# Altium PCB ArduinoFOC.PcbDoc
Units mil, origin at the board's own origin, x right, y up, seen from the top; angles counter-clockwise.
Board outline 2679.32 x 2096.64 mil, 2 copper layers (Top Layer, Bottom Layer), stack 65.792 mil thick; 45 components, 51 nets, 169 pads, 60 vias.
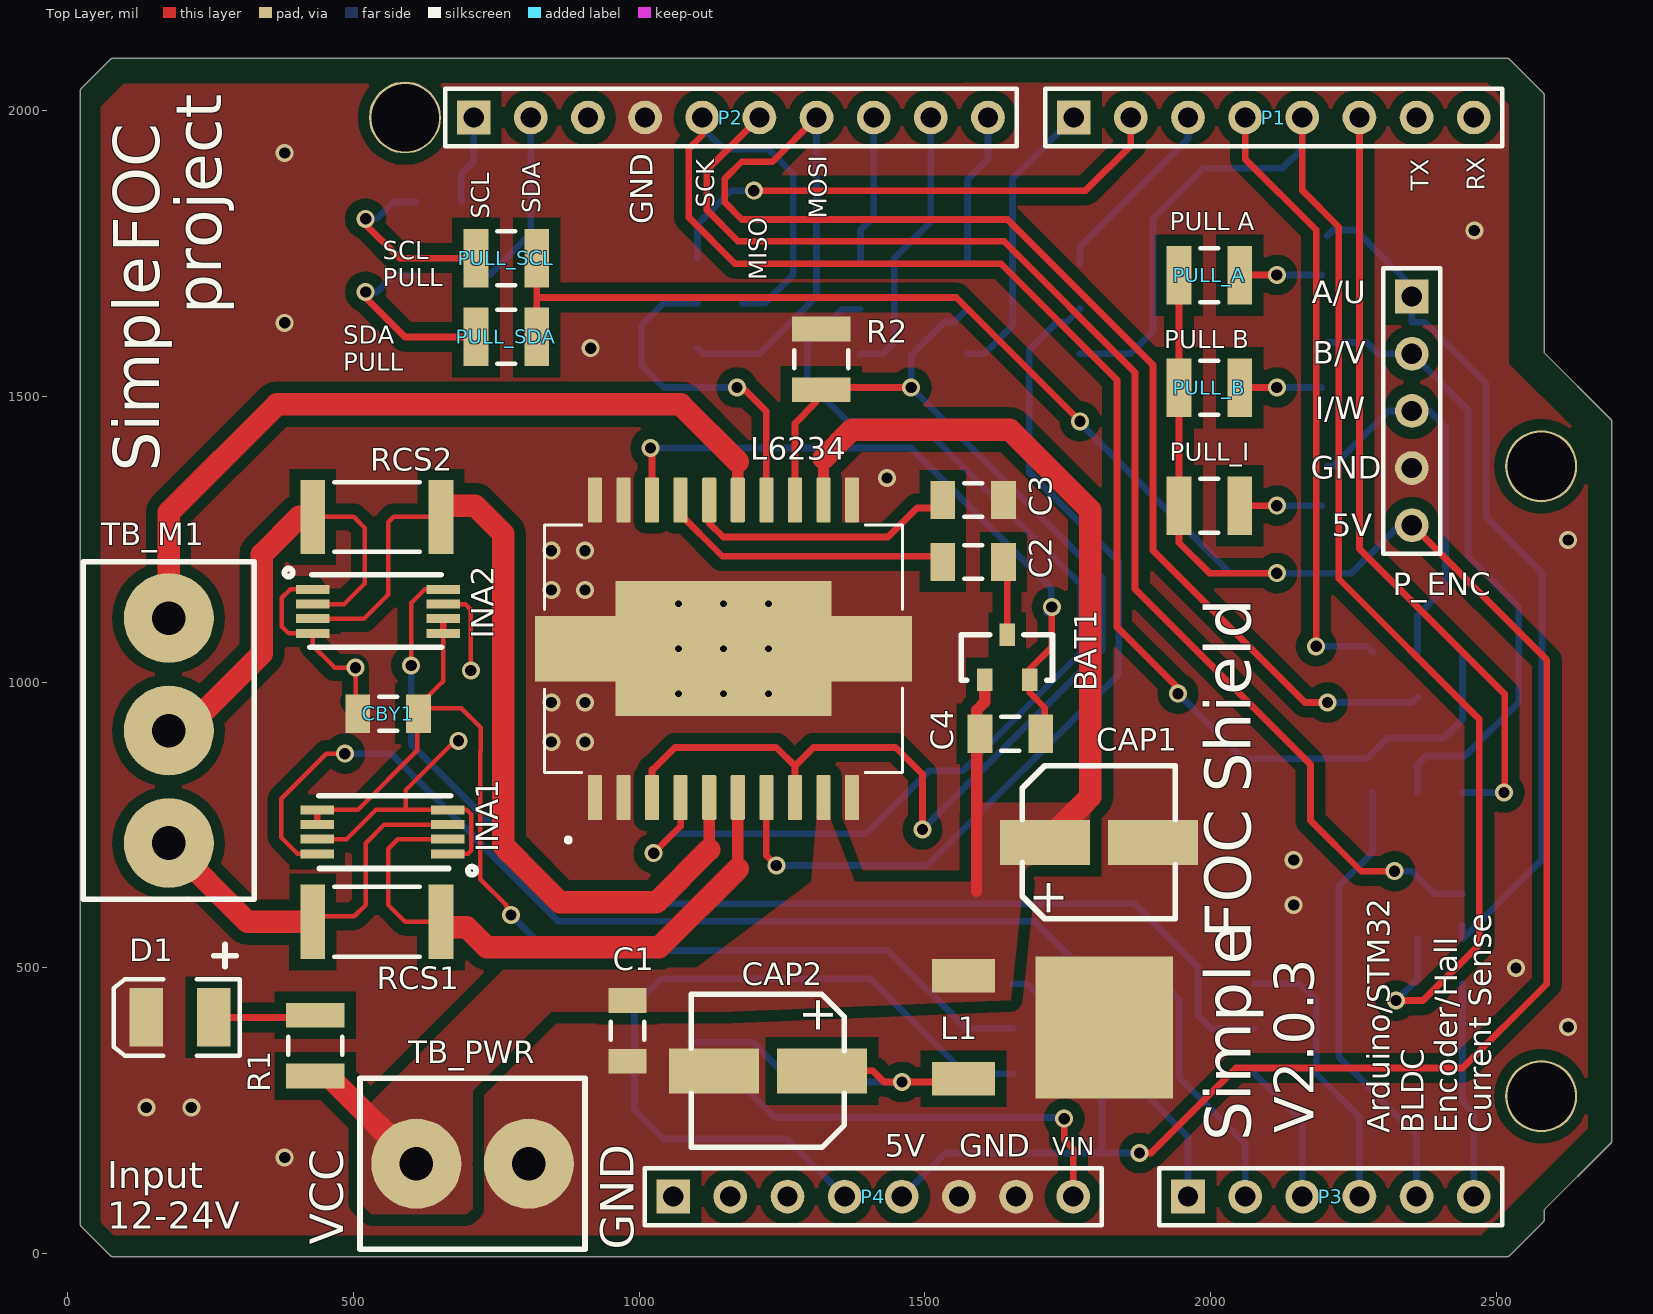
[diagram p0: Top Layer view]
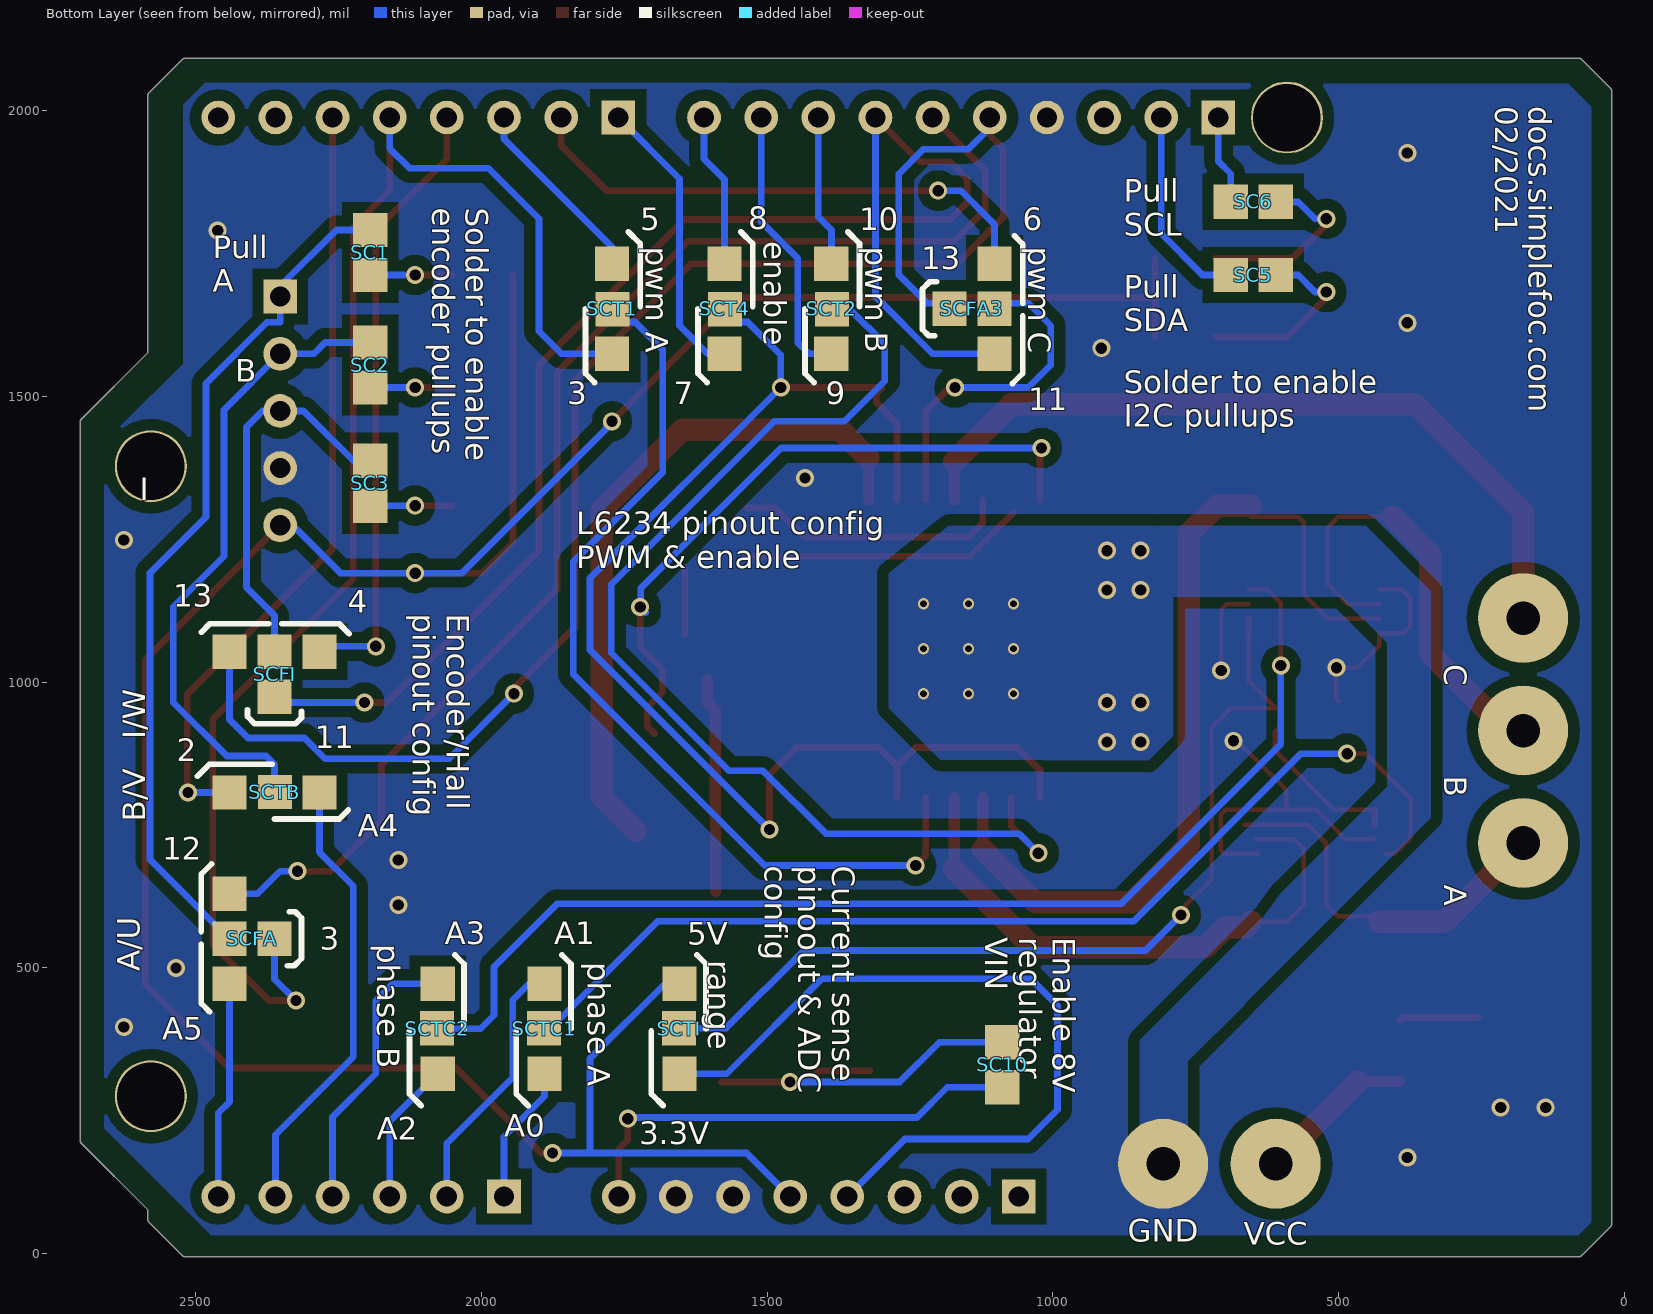
[diagram p1: Bottom Layer view, seen from below]

## Layer stack, top to bottom
Top Solder: solder mask 0.4, Solder Resist, Dk 3.5
Top Layer: signal copper 1.4
Dielectric 1: dielectric 62.9921, FR-4, Dk 4.8
Bottom Layer: signal copper 1.4
Bottom Solder: solder mask 0.4, Solder Resist, Dk 3.5

## Board outline
30.9,40.75 cw(c34.45,44.29) 30.89,40.76 24.01,47.63 75.19,-3.55 75.18,-3.53 ccw(c78.74,0) 78.74,-5.02 2519.68,-5.02 ccw(c2519.68,0) 2523.25,-3.53 2523.23,-3.55 2582.29,55.51 2582.27,55.49 ccw(c2578.74,59.06) 2583.76,59.06 2583.76,76.66 2700.4,193.3 2700.38,193.29 ccw(c2696.85,196.85) 2701.87,196.85 2701.87,1456.69 ccw(c2696.85,1456.69) 2700.38,1460.26 2700.4,1460.24 2583.76,1576.88 2583.76,2027.56 ccw(c2578.74,2027.56) 2582.29,2031.11 2523.23,2090.16 ccw(c2519.68,2086.61) 2519.68,2091.63 78.74,2091.63 ccw(c78.74,2086.61) 75.16,2090.13 75.19,2090.16 24.01,2038.98 24.03,2038.99 ccw(c27.56,2035.43) 22.54,2035.43 22.54,51.18 ccw(c27.56,51.18)

## Design rules (kind name [scope] priority, off if disabled: settings)
Clearance [All] p1: gap=19.68 ignorepadtopadclearanceinfootprint=FALSE except(7.87: Arc-Arc Arc-Track Arc-SMDPad Track-Track Track-SMDPad SMDPad-SMDPad)
ComponentClearance [InComponent('P_MOT') vs InComponent('TB_M1')] p1: gap=10 collisioncheckmode=3 verticalgap=10 showdistances=FALSE
NetsToIgnore [All] p1:
PolygonConnect PolygonConnect_2 [InNet('VCC')] p1: thpad.connectstyle=Direct thpad.reliefconductorwidth=10 thpad.reliefentries=4 thpad.polygonreliefangle="90 Angle" thpad.airgapwidth=10 smdpad.connectstyle=Direct smdpad.reliefconductorwidth=10 smdpad.reliefentries=4 smdpad.polygonreliefangle="90 Angle" smdpad.airgapwidth=10 via.connectstyle=Relief via.reliefconductorwidth=10 via.reliefentries=4 via.polygonreliefangle="90 Angle" via.airgapwidth=10
PolygonConnect PolygonConnect_1 [InNet('GND')] p2: connectstyle=Direct reliefconductorwidth=10 reliefentries=4 polygonreliefangle="90 Angle" airgapwidth=10
PolygonConnect [All] p3: connectstyle=Relief reliefconductorwidth=10 reliefentries=4 polygonreliefangle="90 Angle" airgapwidth=10
RoutingVias [All] p1: holewidth=19.68 width=31.5 viastyle="Through Hole" minholewidth=11.81 minwidth=19.68 maxholewidth=28 maxwidth=50
SolderMaskExpansion [All] p1: expansion=4 istentingtop=FALSE
UnpouredPolygon [All] p1: allowunpoured=TRUE allowshelved=TRUE
Width Mot_line [InNetClass('Mot')] p1: maxlimit=39.37 minlimit=3.94 preferedwidth=7.87 minimp=50.000000 maximp=50.000000 favimp=50.000000
Width PWR_line [InNet('VCC')] p2: maxlimit=39.37 minlimit=7.87 preferedwidth=19.68 minimp=50.000000 maximp=50.000000 favimp=50.000000
Width GND_line [InNet('GND')] p3: maxlimit=47.24 minlimit=3.94 preferedwidth=7.87 minimp=50.000000 maximp=50.000000 favimp=50.000000
Width [All] p4: maxlimit=39.37 minlimit=7.87 preferedwidth=11.81 minimp=50.000000 maximp=50.000000 favimp=50.000000
28 further rules are at their usual default settings.

## Classes and differential pairs
net class Mot: NetINA1_2 NetINA1_3 NetINA2_2 NetINA2_3 NetL6234_15

## Components (designator, comment, footprint, x,y, rotation, side; value= is the part's Value field where it differs from the comment)
BAT1 "BAT54S" BAT54s 1683.7,1083.31 r270 top
C1 "Cap Semi" C1206 980,390 r270 top value=100nF
C2 "Cap Semi" C1206 1584.65,1210.63 r0 top value=10nF
C3 "Cap Semi" C1206 1584.65,1318.9 r0 top value=1uF
C4 "Cap Semi" C1206 1650,910 r0 top value=220nF
CAP1 "EEH-ZA1E101XP" EEH-ZA1E101XP 1938.35,853.86 r180 top
CAP2 "VZH100M1HTR-0606" EEH-ZA1E101XP 1091.65,186.14 r0 top
CBY1 "Cap Semi" C1206 561.02,944.88 r0 top value=0.1uF
D1 "LED3" 3.5X2.8X1.9 196.85,413.39 r180 top
INA1 "INA240" INA240 551.18,738.19 r90 top
INA2 "INA240" INA240 543.31,1124.02 r270 top
L1 "l78M08" L7805 1711.61,401.57 r0 top
L6234 "L6234PD013TR" SOIC127P1420X360-21N 1147.83,1058.66 r0 top
P1 "Header 8" HDR1X8 1760.63,1988.19 r0 top locked
P2 "Header 10" HDR1X10 710.63,1988.19 r0 top
P3 "Header 6" HDR1X6 1960.63,100 r0 top locked
P4 "Header 8" HDR1X8 1059.84,100 r0 top locked
P_ENC "Header 5" HDR1X5 2352.36,1674.8 r270 top
PULL_A "Res3" 14-1210 1998.03,1712.6 r0 top value=3.3K
PULL_B "Res3" 14-1210 1998.03,1515.75 r0 top value=3.3K
PULL_I "Res3" 14-1210 1998.03,1309.06 r0 top value=3.3K
PULL_SCL "Res3" 14-1210 767.72,1742.13 r180 top value=4.7K
PULL_SDA "Res3" 14-1210 767.72,1604.33 r180 top value=4.7K
R1 "Res3" 14-1210 433.07,364.17 r270 top value=1K
R2 "Res3" 14-1210 1318.9,1564.96 r270 top value=4.7K
RCS1 "Res3" RESC6332 541.34,580.71 r180 top value=10mOhm
RCS2 "Res3" RESC6332 541.34,1289.37 r180 top value=10mOhm
SC1 "solder_connection" solder_connection 2194.88,1791.34 r270 bottom
SC2 "solder_connection" solder_connection 2194.88,1594.49 r270 bottom
SC3 "solder_connection" solder_connection 2194.88,1387.8 r270 bottom
SC5 "solder_connection" solder_connection 688.98,1712.6 r180 bottom
SC6 "solder_connection" solder_connection 688.98,1840.55 r180 bottom
SC10 "solder_connection" solder_connection 1088.58,370.08 r270 bottom
SCFA "solder_connection_four" solder_connection_four 2440.94,551.18 r90 bottom
SCFA3 "solder_connection_four" solder_connection_four 1102.36,1653.54 r270 bottom
SCFI "solder_connection_four" solder_connection_four 2362.2,1053.15 r180 bottom
SCT1 "solder_connection_tripple" solder_connection_tripple 1771.65,1653.54 r270 bottom
SCT2 "solder_connection_tripple" solder_connection_tripple 1387.8,1653.54 r270 bottom
SCT4 "solder_connection_tripple" solder_connection_tripple 1574.8,1653.54 r270 bottom
SCTB "solder_connection_tripple" solder_connection_tripple 2362.2,807.09 r180 bottom
SCTC1 "solder_connection_tripple" solder_connection_tripple 1889.76,393.7 r90 bottom
SCTC2 "solder_connection_tripple" solder_connection_tripple 2076.77,393.7 r90 bottom
SCTI "3.3 or 5 v" solder_connection_tripple 1653.54,393.7 r90 bottom
TB_M1 "TB002-500-03BE" TB002-500-03BE 177.17,718.5 r90 top
TB_PWR "TB002-500-02BE" TB002-500-02BE 807.09,157.48 r180 top

## Footprints (in the part's own frame and the unit in brackets; to place one, negate y for a bottom-side part, rotate by r counter-clockwise, add the part's x,y. Pads: shape width x height; smd on the part's side, far side on the other; paste and mask are expansions set on the pad)
3.5X2.8X1.9 [mm] "SM LED; 2 C-Bend Leads; Body 3.5 x 2.8 x 1.9 mm, inc leads (LxWxH typ)"
  rect 1.5x2.6 smd: 1(-1.5,0) 2(1.5,0)
  silkscreen extent -2.65,-1.7 2.95,1.7
14-1210 [mm] "Chip Resistor, Body 3.2x2.5mm, IPC High Density"
  rect 1.1x2.6 smd: 1(-1.35,0) 2(1.35,0)
  silkscreen extent -0.4,-1.2 0.4,1.2, body extent -1.68,-1.32 1.68,1.32, height 0.9
BAT54s [mm]
  rect 1x0.7 smd: 1(2,-2) 2(2,0) 3(0,-1)
  silkscreen extent 0,-3.05 2.03,1.02, body extent -0.46,-2.48 2.46,0.44, height 1
C1206 [mm] "Chip Capacitor, Body 3.2x1.6mm, IPC High Density"
  rect 1.1x1.7 smd: 1(-1.35,0) 2(1.35,0)
  silkscreen extent -0.4,-0.75 0.4,0.75, body extent -1.7,-0.9 1.7,0.9, height 1.3
EEH-ZA1E101XP [mm]
  rect 4x2 smd: 1(1,3.4) 2(5.8,3.4)
  silkscreen extent 0,0 6.8,6.8, body extent -0.3,0.2 7,6.8, height 7.7
HDR1X5 [mm] "Connector; Header; 5 Position"
  rect 1.5x1.5 hole 0.9: 1(0,0)
  round 1.5 hole 0.9: 2(2.54,0) 3(5.08,0) 4(7.62,0) 5(10.16,0)
  silkscreen extent -1.27,-1.27 11.43,1.27
HDR1X6 [mm] "Connector; Header; 6 Position"
  rect 1.5x1.5 hole 0.9: 1(0,0)
  round 1.5 hole 0.9: 2(2.54,0) 3(5.08,0) 4(7.62,0) 5(10.16,0) 6(12.7,0)
  silkscreen extent -1.27,-1.27 13.97,1.27
HDR1X8 [mm] "Connector; Header; 8 Position"
  rect 1.5x1.5 hole 0.9: 1(0,0)
  round 1.5 hole 0.9: 2(2.54,0) 3(5.08,0) 4(7.62,0) 5(10.16,0) 6(12.7,0) 7(15.24,0) 8(17.78,0)
  silkscreen extent -1.27,-1.27 19.05,1.27
HDR1X10 [mm] "Connector; Header; 10 Position"
  rect 1.5x1.5 hole 0.9: 1(0,0)
  round 1.5 hole 0.9: 2(2.54,0) 3(5.08,0) 4(7.62,0) 5(10.16,0) 6(12.7,0) 7(15.24,0) 8(17.78,0) 9(20.32,0) 10(22.86,0)
  silkscreen extent -1.27,-1.27 24.13,1.27
INA240 [mm]
  rect 0.4x1.5 smd mask+0.05: 1(-0.975,-2.9) 2(-0.325,-2.9) 3(0.325,-2.9) 4(0.975,-2.9) 5(0.975,2.9) 6(0.325,2.9) 7(-0.325,2.9) 8(-0.975,2.9)
  silkscreen extent -1.91,-4.16 1.6,2.83, body extent -1.5,-3.3 1.5,3.3, height 1.2
L7805 [mm] "l7805"
  rect 2.8x1.5 smd: 1(-3.65,2.15) 3(-3.65,-2.422)
  rect 6.1x6.3 smd: 2(2.6,-0.15)
  body extent -4.66,-3.3 5.06,3.1, height 2.3
RESC6332 [mm] "Chip Resistor, Body 6.3x3.2mm, IPC High Density"
  rect 1.1x3.3 smd: 1(-2.85,0) 2(2.85,0)
  silkscreen extent -1.9,-1.55 1.9,1.55, body extent -3.22,-1.68 3.22,1.68, height 0.9
SOIC127P1420X360-21N [mm]
  rrect16% 0.63x1.99 smd: 1(-5.715,-6.61) 2(-4.445,-6.61) 3(-3.175,-6.61) 4(-1.905,-6.61) 5(-0.635,-6.61) 6(0.635,-6.61) 7(1.905,-6.61) 8(3.175,-6.61) 9(4.445,-6.61) 10(5.715,-6.61) 11(5.715,6.61) 12(4.445,6.61) 13(3.175,6.61) 14(1.905,6.61) 15(0.635,6.61) 16(-0.635,6.61) 17(-1.905,6.61) 18(-3.175,6.61) 19(-4.445,6.61) 20(-5.715,6.61)
  rect 9.6x6 smd paste-6: 21(0,0)
  rect 4x2.9 smd paste-3: 22(-6.375,0) 23(6.375,0)
  silkscreen extent -7.95,-8.6 7.95,5.5, body extent -8.26,-7.73 7.8,8.27, height 3.5
solder_connection [mil]
  rect 60x60 smd: 1(0,0) 2(78.74,0)
solder_connection_four [mil]
  rect 60x60 smd: 1(0,0) 2(78.74,0) 3(-78.74,0) 4(0,-78.74)
  silkscreen extent -128,-126 131,49
solder_connection_tripple [mil]
  rect 60x60 smd: 1(0.98,0.98) 2(78.74,0) 3(-78.74,0)
  Top Layer region: -28.54,34.45
  silkscreen extent -135,-46 129,49
TB002-500-02BE [mm] "TB002-500-02BE"
  round 4 hole 1.5: 1(0,0) 2(5,0)
  silkscreen extent -2.5,-3.8 7.5,3.8, body extent -2.5,-4.4 7.5,4.6, height 13.55
TB002-500-03BE [mm] "TB002-500-03BE"
  round 4 hole 1.5: 1(0,0) 2(5,0) 3(10,0)
  Top Layer lines w0.254: 0,0 0,-0.08
  silkscreen extent -2.5,-3.8 12.5,3.8, body extent -2.57,-5.2 13.17,4.6, height 13.8

## Part data
BAT1: Supplier Part Number 1=512-BAT54S, Supplier 1=Mouser
C1 C2 C3 C4 CBY1: "Capacitor (Semiconductor SIM Model)", LatestRevisionDate=29-May-2009, LatestRevisionNote="IPC-7351 Footprint Added.", PackageDescription="Chip Capacitor", PackageReference=C1206, Published=8-Jun-2000, Publisher="Altium Limited"
CAP1: Supplier Part Number 1=667-EEH-ZA1E101XP, Supplier 1=Mouser
CAP2: library part EEH-ZA1E101XP, Supplier Part Number 1=667-EEH-ZA1E101XP, Supplier 1=Mouser
D1: "Typical BLUE SiC LED", DatasheetVersion=16-Apr-2002, LatestRevisionDate=17-Dec-2003, LatestRevisionNote="PCB Footprint replaced.", PackageDescription="SM LED; 2 C-Bend Leads; Body 3.5 x 2.8 x 1.9 mm, inc leads (LxWxH typ)", PackageReference=3.5X2.8X1.9, PackageVersion=16-Apr-2002, Published=8-Jun-2000, Publisher="Altium Limited"
INA1 INA2: Supplier Part Number 1=595-INA240A2PWR, Supplier 1=Mouser
L6234: "Motor Driver BiCDMOS Parallel PowerSO-20", Package="SO-20 STMicroelectronics", Digi-Key_Part_Number=497-5352-1-ND, Digi-Key_Purchase_URL=https://www.digikey.com/product-detail/en/stmicroelectronics/L6234PD013TR/497-5352-1-ND/1154483?utm_source=snapeda&utm_medium=aggregator&utm_campaign=symbol, MF=STMicroelectronics, MP=L6234PD013TR, SnapEDA_Link=https://www.snapeda.com/parts/L6234PD013TR/STMicroelectronics/view-part/75337/?ref=snap
P1 P4: "Header, 8-Pin", LatestRevisionDate=17-Jul-2002, LatestRevisionNote="Re-released for DXP Platform.", Publisher="Altium Limited"
P2: "Header, 10-Pin", LatestRevisionDate=17-Jul-2002, LatestRevisionNote="Re-released for DXP Platform.", Publisher="Altium Limited"
P3: "Header, 6-Pin", LatestRevisionDate=17-Jul-2002, LatestRevisionNote="Re-released for DXP Platform.", Publisher="Altium Limited"
P_ENC: "Header, 5-Pin", LatestRevisionDate=17-Jul-2002, LatestRevisionNote="Re-released for DXP Platform.", Publisher="Altium Limited"
PULL_A PULL_B PULL_I PULL_SCL PULL_SDA R1 R2 RCS1 RCS2: "Resistor", LatestRevisionDate=29-May-2009, LatestRevisionNote="IPC-7351 Footprint Added.", PackageDescription="Chip Resistor", PackageReference=J1-0603, Published=8-Jun-2000, Publisher="Altium Limited"
SCTI: library part solder_connection_tripple
TB_M1: Supplier Part Number 1=490-TB002-500-03BE, Supplier 1=Mouser
TB_PWR: Supplier Part Number 1=490-TB002-500-02BE, Supplier 1=Mouser

## Free pads (board coordinates)
  round 125.98 hole 118.11: T1(590.55,1988.19) T2(2578.74,1377.95) T3(2578.74,275.59)

## Via types
v1: diameter 31.5, hole 19.68, Top Layer to Bottom Layer, 51 vias
v2: diameter 19.68, hole 11.81, Top Layer to Bottom Layer, 9 vias

## Nets (pads, with @x,y where several pads share a name; then routed paths per layer and width w, separated by ;. In a path a pad name is that pad's centre, name@x,y a point inside that pad or via, vN(x,y) a via of type N, cw(c..) or ccw(c..) an arc to the next point about the centre after c; other vN are vias at no path point)
3.3V: P4.4 SCTI.3 | length 1362.6
  Bottom Layer w11.81: P4.4 1259.06,200.79 1043.31,200.79 992.13,251.97 992.13,434.06 1039.37,481.3 1404.53,481.3 1570.87,314.96 SCTI.3
+5: P4.5 P_ENC.5 PULL_A.1 PULL_B.1 PULL_I.1 PULL_SCL.1 PULL_SDA.1 SCTI.2 | length 5147.3
  Top Layer w11.81: PULL_SDA.1 820.87,1673.23 ; PULL_SCL.1 820.87,1673.23 ; v1(1771.65,1456.69) 1555.12,1673.23 820.87,1673.23 ; v1(1875.98,176.18) 1896.18,176.18 2044.8,324.8 2440.94,324.8 2588.58,472.44 2588.58,1038.58 P_ENC.5 P_ENC.5@2327.95,1274.8 ; PULL_A.1 PULL_B.1 PULL_I.1 1944.88,1244.09 1998.03,1190.94 v1(2116.14,1190.94)
  Bottom Layer w11.81: P4.5 1536.02,176.18 1811.02,176.18 ; SCTI.2 1679.13,472.44 1810.04,341.54 1810.04,177.17 1811.02,176.18 ; v1@1781.5,1456.69 1781.5,1443.9 2034.45,1190.94 v1(2116.14,1190.94) 2247.05,1190.94 2330.91,1274.8 P_ENC.5 ; v1(1875.98,176.18) 1811.02,176.18
GND: C1.2 C3.2 CAP1.1 CAP2.1 CBY1.1 D1.2 INA1.1 INA1.4 INA1.7 INA2.1 INA2.4 INA2.7 L1.2 L6234.1 L6234.2 L6234.10 L6234.11 L6234.19 L6234.20 L6234.21 L6234.22 L6234.23 P2.4 P4.6 P4.7 P_ENC.4 R2.1 TB_PWR.1 | length 1092.1
  Top Layer w7.87: INA2.1 389.76,1162.4 375,1147.64 375,1097.44 386.81,1085.63 INA2.4 429.13,1063.98 461.26,1031.85 467.52,1025.59 v1(503.94,1025.59) 503.94,970.26 CBY1.1@500.6,966.92 ; INA1.7@439.96,728.35 INA1.7 488.19,725.39 539.37,776.57 591.54,776.57 ; INA1.1@641.66,699.8 INA1.1 700.79,699.8 706.69,705.71 706.69,768.7 698.82,776.57 INA1.4 591.54,776.57 ; INA2.7 695.87,1136.81 705.71,1126.97 v1(705.71,1020.67) ; v1(684.06,897.64) 678.15,897.64 591.54,811.02 591.54,776.57
  other v1: 379.92,168.31 137.8,255.91 216.54,255.91 2625.98,396.65 2534.45,500 2145.67,610.24 2145.67,688.98 846.46,895.67 905.51,895.67 846.46,964.57 905.51,964.57 846.46,1161.42 905.51,1161.42 846.46,1230.32 905.51,1230.32 2625.98,1249.02 1434.06,1357.28 915.35,1584.65 379.92,1628.94 2461.61,1790.35 379.92,1926.18
  other v2: 1069.09,979.92 1147.83,979.92 1226.57,979.92 1069.09,1058.66 1147.83,1058.66 1226.57,1058.66 1069.09,1137.4 1147.83,1137.4 1226.57,1137.4
NetBAT1_2: BAT1.2 C4.2 L6234.18 | length 1200.9
  Top Layer w11.81: v1(1020,1410) 1017.16,1410 1022.83,1404.33 L6234.18 ; C4.2@1697.48,910 1710,922.52 1710,955.43 1683.7,981.74 1683.7,1022.99 1722.44,1061.74 v1(1722.44,1131.89)
  Bottom Layer w11.81: v1(1020,1410) 1475.83,1410 1721.46,1164.37 v1@1721.46,1130.91 ; v1@1712.6,1122.05 v1@1721.46,1130.91 ; v1(1722.44,1131.89) v1@1721.46,1130.91
NetBAT1_3: BAT1.3 C2.2 | length 117.5
  Top Layer w11.81: BAT1.3 C2.2@1644.33,1200.79
NetC2_1: C2.1 L6234.17 | length 500.3
  Top Layer w11.81: L6234.17@1068.9,1297.24 1145.67,1220.47 C2.1@1537.4,1220.47
NetC3_1: C3.1 L6234.16 | length 484.1
  Top Layer w11.81: L6234.16 1122.83,1278.74 1147.44,1254.13 1435.43,1254.13 1486.42,1305.12 C3.1@1535.43,1305.12
NetCAP2_2: CAP2.2 L1.3 SC10.1 | length 668.5
  Top Layer w11.81: CAP2.2 1409.64,320 1429.04,300.59 v1(1460,300.59) 1579.41,300.59 L1.3@1580,300
  Bottom Layer w11.81: SC10.1 1198.82,370.08 1268.31,300.59 v1(1460,300.59)
NetCBY1_2: CBY1.2 INA1.5 INA1.6 INA2.5 INA2.6 SCTI.1 | length 1937.9
  Top Layer w7.87: INA1.5 507.87,776.57 612.2,880.91 612.2,912.96 600.39,924.77 CBY1.2@600.39,954.72 ; INA2.5 657.48,1001.97 647.93,992.42 610.24,954.72 688.98,954.72 723.43,920.28 723.43,881.33 722.44,880.35 722.44,655.51 767.72,610.24 766.73,609.25 775.93,600.06 v1(775.93,592.52)
  Top Layer w11.81: INA1.6 INA1.5 ; INA2.5 INA2.6
  Bottom Layer w11.81: v1(775.93,592.52) 837.94,530.51 1436.02,530.51 1571.85,394.69 SCTI.1
NetD1_1: D1.1 R1.1 | length 140.2
  Top Layer w11.81: D1.1 387.79,413.39 R1.1@393.7,407.48
NetINA1_2: INA1.2 L6234.6 RCS1.1 | length 1014.2
  Top Layer w7.87: INA1.2@645.67,725.39 577.76,725.39 561.02,708.66 561.02,610.24 590.55,580.71 RCS1.1
  Top Layer w19.68: 1172.83,673.48 L6234.6
  Top Layer w39.37: RCS1.1 663.39,570.87 698.82,570.87 733.32,536.36 1035.71,536.36 1172.83,673.48
NetINA1_3: INA1.3 RCS1.2 TB_M1.1 | length 679.2
  Top Layer w7.87: RCS1.2 438.98,590.55 501.97,590.55 521.65,610.24 521.65,718.5 554.13,750.98 INA1.3
  Top Layer w39.37: TB_M1.1 314.96,580.71 RCS1.2
NetINA1_8: INA1.8 SCTC1.1 | length 1874.8
  Top Layer w7.87: INA1.8@417.32,699.8 402.56,699.8 374.02,728.35 374.02,796.19 452.87,875.04 v1(485.26,875.04)
  Bottom Layer w11.81: v1(485.26,875.04) 565.9,875.04 859.25,581.69 938.98,581.69 1357.28,581.69 1691.93,581.69 1879.92,393.7 SCTC1.1@1889.76,403.54
NetINA2_2: INA2.2 RCS2.2 TB_M1.2 | length 824.3
  Top Layer w0: RCS2.2@419.29,1299.21 RCS2.2@433.07,1299.21
  Top Layer w7.87: INA2.2 484.25,1136.81 519.69,1172.24 519.69,1270.32 500.63,1289.37 RCS2.2
  Top Layer w11.81: TB_M1.2 TB_M1.2@205.35,915.35 ; 405.51,1289.37 RCS2.2
  Top Layer w39.37: TB_M1.2@205.35,915.35 340,1050 340,1223.86 405.51,1289.37
NetINA2_3: INA2.3 L6234.5 RCS2.1 | length 1609.5
  Top Layer w7.87: INA2.3 518.7,1111.22 561.02,1153.54 561.02,1279.76 570.63,1289.37 RCS2.1
  Top Layer w19.68: 1122.83,707 L6234.5
  Top Layer w39.37: RCS2.1@653.54,1309.06 713.36,1309.06 762.8,1259.62 762.8,714.57 790.35,687.01 ; 767.72,708.66 789.86,686.52 861.61,614.76 1030.6,614.76 1122.83,707
NetINA2_8: INA2.8 SCTC2.1 | length 2044.2
  Top Layer w7.87: v1(601.38,1029.53) 601.38,1138.78 625,1162.4 INA2.8
  Bottom Layer w11.81: v1(601.38,1029.53) 601.38,891.73 880.91,612.2 977.36,612.2 1868.11,612.2 1978.35,501.97 1978.35,417.32 2001.97,393.7 SCTC2.1@2076.77,393.7
NetL6234_3: L6234.3 L6234.8 L6234.13 R2.2 SCT4.1 | length 2365.6
  Top Layer w11.81: L6234.3 1022.83,845.67 ; 1022.83,847.24 1022.83,845.67 ; L6234.8 1272.83,853.15 ; L6234.13 1272.83,1452.95 1309.06,1489.17 1309.06,1505.91 1299.21,1515.75 v1(1476.38,1515.75) v1@1480.32,1519.69 ; v1(1496.06,742.33) 1496.06,838.96 1449.19,885.83 1305.51,885.83 1272.83,853.15 ; 1022.83,845.67 1062.99,885.83 1240.16,885.83 1272.83,853.15
  Bottom Layer w11.81: v1(1496.06,742.33) 1810,1056.27 1810,1182.13 v1(1476.38,1515.75) 1476.38,1572.57 1534.2,1630.39 1551.65,1630.39 SCT4.1@1574.8,1653.54
NetL6234_4: L6234.4 SCT2.1 | length 1937.5
  Top Layer w11.81: v1(1025.59,700.79) 1072.83,748.03 L6234.4
  Bottom Layer w11.81: v1(1025.59,700.79) 1059.79,734.99 1397.39,734.99 1507.38,844.98 1566.44,844.98 1773.03,1051.57 1773.03,1170.87 1487.2,1456.69 1365.16,1456.69 1294.29,1527.56 1294.29,1591.54 1355.31,1652.56 SCT2.1
NetL6234_7: L6234.7 SCT1.1 | length 1615.7
  Top Layer w11.81: L6234.7 1222.83,696.46 v1(1240.16,679.13)
  Bottom Layer w11.81: v1(1240.16,679.13) 1504.41,679.13 1839.57,1014.29 1839.57,1210.43 1683.07,1366.93 1683.07,1582.41 1731.05,1630.39 1748.5,1630.39 SCT1.1@1771.65,1653.54
NetL6234_14: L6234.14 SCFA3.1 | length 591.2
  Top Layer w11.81: v1(1171.26,1515.75) 1181.1,1515.75 1222.83,1474.02 L6234.14
  Bottom Layer w11.81: SCFA3.1@1102.36,1663.39 1043.31,1663.39 1003.94,1624.02 1003.94,1555.12 1043.31,1515.75 v1(1171.26,1515.75)
NetL6234_15: L6234.15 TB_M1.3 | length 1381.6
  Top Layer w19.68: L6234.15 1172.83,1386.22
  Top Layer w39.37: TB_M1.3@187.01,1102.36 TB_M1.3 177.17,1297.17 366.22,1486.22 1072.83,1486.22 1172.83,1386.22
NetP1_1: P1.1 SCT4.2 | length 507.7
  Bottom Layer w11.81: SCT4.2 1604.33,1574.8 1653.54,1624.02 1653.54,1881.1 P1.1
NetP1_2: P1.2 SCFA3.3 | length 923.4
  Top Layer w11.81: v1(1200.79,1860.24) 1781.5,1860.24 1860.63,1939.37 P1.2
  Bottom Layer w11.81: SCFA3.3@1102.36,1742.13 1102.36,1801.18 1161.42,1860.24 v1(1200.79,1860.24)
NetP1_3: P1.3 SCT1.3 | length 334.2
  Bottom Layer w11.81: SCT1.3 1771.65,1761.81 1960.63,1950.79 P1.3
NetP1_4: P1.4 SCFI.2 | length 1069.4
  Top Layer w11.81: P1.4 2060.63,1915.75 2185.04,1791.34 v1@2185.04,1072.83
  Bottom Layer w11.81: v1(2185.04,1062.99) 2273.62,1062.99 SCFI.2
NetP1_5: P1.5 SCFA.4 SCT1.2 | length 2592.5
  Top Layer w11.81: P1.5 2160.63,1860.29 2224.41,1796.51 2224.41,1181.1 2470.47,935.04 2470.47,541.34 2372.05,442.91 v1(2324.8,442.91)
  Bottom Layer w11.81: SCT1.2 1860.24,1574.8 1899.61,1614.17 1899.61,1811.02 1988.19,1899.61 2125.98,1899.61 2160.63,1934.25 P1.5 ; v1(2324.8,442.91) 2362.2,480.32 SCFA.4
NetP1_6: P1.6 SCTB.3 | length 1384.1
  Top Layer w11.81: P1.6 2260.63,1233.46 2514.76,979.33 2514.76,814.96 v1@2522.64,807.09
  Bottom Layer w11.81: SCTB.3 2524.61,807.09 v1(2513.78,807.09)
NetP2_1: P2.1 SC6.1 | length 156.6
  Bottom Layer w11.81: SC6.1 688.98,1889.76 710.63,1911.42 P2.1
NetP2_2: P2.2 SC5.1 | length 345
  Bottom Layer w11.81: SC5.1@698.82,1712.6 738.19,1712.6 810.63,1785.04 P2.2
NetP2_5: P2.5 SCFA3.4 SCFI.3 | length 2827.8
  Top Layer w11.81: P2.5@1119.69,1979.13 1110.63,1970.08 1110.63,1957.09 1087.2,1933.66 1087.2,1813.19 1168.11,1732.28 1633.36,1732.28 1836.61,1529.03 1836.61,1096.46 1943.23,989.84 v1(1943.23,980)
  Bottom Layer w11.81: P2.5 1110.63,1970.08 1147.93,1932.78 1226.67,1932.78 1269.69,1889.76 1269.69,1712.6 1220.47,1663.39 SCFA3.4@1181.1,1663.39 ; v1(1943.23,980) 2057.09,866.14 2273.62,866.14 2309.85,902.37 2408.28,902.37 2440.95,935.04 SCFI.3
NetP2_6: P2.6 SCFA.2 | length 2308.1
  Top Layer w11.81: P2.6 1118.7,1896.26 1118.7,1826.24 1173.28,1771.65 1638.53,1771.65 1868.11,1542.07 1868.11,1163.39 2175.2,856.3 2175.2,757.87 2263.78,669.29 v1@2332.68,669.29
  Bottom Layer w11.81: v1(2321.85,669.29) 2352.36,669.29 2391.73,629.92 SCFA.2
NetP2_7: P2.7 SCFA3.2 SCFI.4 | length 2582.5
  Top Layer w11.81: P2.7 1233.27,1910.83 1179.83,1910.83 1150.2,1881.19 1150.2,1839.28 1179.83,1809.65 1645.08,1809.65 1899.61,1555.12 1899.61,1230.32 2165.35,964.57 v1(2204.72,964.57)
  Bottom Layer w11.81: SCFA3.2@1102.36,1584.65 1112.2,1574.8 1210.63,1574.8 1310.63,1674.8 P2.7 ; v1(2204.72,964.57) 2352.36,964.57 SCFI.4
NetP2_8: P2.8 SCT2.3 | length 265.4
  Bottom Layer w11.81: SCT2.3 1387.79,1791.34 1410.63,1814.17 P2.8
NetP2_9: P2.9 SCT2.2 | length 487.3
  Bottom Layer w11.81: SCT2.2 1427.16,1574.8 1446.85,1594.49 1446.85,1742.13 1510.63,1805.91 P2.9
NetP2_10: P2.10 SCT4.3 | length 270.7
  Bottom Layer w11.81: SCT4.3 1574.8,1879.92 1610.63,1915.75 P2.10
NetP3_1: P3.1 SCTC1.3 | length 254.2
  Bottom Layer w11.81: SCTC1.3@1889.76,324.8 1889.76,275.59 1960.63,204.72 P3.1
NetP3_2: P3.2 SCTC1.2 | length 469
  Bottom Layer w11.81: SCTC1.2@1889.76,482.28 SCTC1.2 1917.06,472.44 1945.35,444.14 1945.35,308.58 2060.63,193.31 P3.2
NetP3_3: P3.3 SCTC2.3 | length 249.7
  Bottom Layer w11.81: SCTC2.3 2160.63,231.1 P3.3
NetP3_4: P3.4 SCTC2.2 | length 494.7
  Bottom Layer w11.81: SCTC2.2 2155.51,472.44 2185.04,442.91 2185.04,314.96 2260.63,239.37 P3.4
NetP3_5: P3.5 SCTB.2 | length 788
  Bottom Layer w11.81: SCTB.2 2283.46,702.45 2224.41,643.4 2224.41,344.49 2360.63,208.27 P3.5
NetP3_6: P3.6 SCFA.3 | length 380.6
  Bottom Layer w11.81: SCFA.3 2440.94,265.75 2460.63,246.06 P3.6
NetP4_8: P4.8 SC10.2 | length 805.5
  Top Layer w11.81: v1(1744.09,236.22) 1744.09,198.82 1759.84,183.07 P4.8
  Bottom Layer w11.81: SC10.2 1185.04,291.34 1238.19,238.19 v1@1729.33,238.19
NetP_ENC_1: P_ENC.1 SC1.1 SCFA.1 | length 1523.2
  Bottom Layer w11.81: SC1.1@2204.72,1781.5 2214.56,1791.34 2253.94,1791.34 2352.36,1692.91 P_ENC.1 2352.36,1629.92 2375.19,1629.92 2482.28,1522.83 2482.28,1289.37 2580.12,1191.54 2580.12,689.61 2441.69,551.18 SCFA.1 SCFA.1@2440.94,574.33
NetP_ENC_2: P_ENC.2 SC2.1 SCTB.1 | length 1114.7
  Bottom Layer w11.81: SC2.1@2204.72,1594.49 2273.62,1594.49 2293.31,1574.8 P_ENC.2 2450.79,1476.38 2450.79,1220.47 2539.37,1131.89 2539.37,964.57 2445.68,870.88 2376.78,870.88 2362.2,856.3 SCTB.1@2362.2,807.09
NetP_ENC_3: P_ENC.3 SC3.1 SCFI.1 | length 672.5
  Bottom Layer w11.81: SC3.1@2204.72,1377.95 2214.57,1377.95 2311.42,1474.8 P_ENC.3 2383.46,1474.8 2411.42,1446.85 2411.42,1165.83 2362.21,1116.61 SCFI.1
NetPULL_A_2: PULL_A.2 SC1.2 | length 124
  Top Layer w11.81: PULL_A.2 v1(2116.14,1712.6)
  Bottom Layer w11.81: 2135.83,1712.6 SC1.2
NetPULL_B_2: PULL_B.2 SC2.2 | length 133.9
  Top Layer w11.81: PULL_B.2 v1(2116.14,1515.75)
  Bottom Layer w11.81: v1@2125.98,1515.75 SC2.2
NetPULL_I_2: PULL_I.2 SC3.2 | length 133.9
  Top Layer w11.81: PULL_I.2 v1(2116.14,1309.06)
  Bottom Layer w11.81: v1@2125.98,1309.06 SC3.2
NetPULL_SCL_2: PULL_SCL.2 SC6.2 | length 328
  Top Layer w11.81: v1(521.65,1811.02) 521.65,1801.18 580.71,1742.13 PULL_SCL.2
  Bottom Layer w11.81: v1(521.65,1811.02) 541.34,1811.02 570.87,1840.55 SC6.2
NetPULL_SDA_2: PULL_SDA.2 SC5.2 | length 332.1
  Top Layer w11.81: v1(521.65,1683.07) 521.65,1673.23 590.55,1604.33 PULL_SDA.2
  Bottom Layer w11.81: v1(521.65,1683.07) 541.34,1683.07 570.87,1712.6 SC5.2
VCC: BAT1.1 C1.1 C4.1 CAP1.2 L1.1 L6234.9 L6234.12 R1.2 TB_PWR.2 | length 1871.3
  Top Layer w19.68: R1.2@393.7,301.18 R1.2@466.53,301.18 ; TB_PWR.2 TB_PWR.2@610.24,171.26 ; L6234.12 1322.83,1391.73 ; 1590.55,633.86 1590.55,767.72 1591.18,768.34 1591.18,951.41 1604.96,965.19 BAT1.1
  Top Layer w39.37: R1.2@466.53,301.18 TB_PWR.2 ; 1322.83,1391.73 1373.03,1441.93 1648.62,1441.93 1790,1300.55 1790,800 CAP1.2@1730,740
pads on no net: P1.7 P1.8 P2.3 P4.1 P4.2 P4.3

## Polygon pours and split planes (outlines as drawn)
no net on Mechanical 1 (solid): 94.49,2059.06
GND on Top Layer "Top Layer-No Net" (solid, remove dead copper, pour order 48): 98.43,2047.24 57.89,2006.71 57.89,55.2 81.15,31.94 2472.89,31.94 2482.73,41.78 2660.43,219.49 2660.43,1419.2 2522.1,1557.53 2522.1,2010.29 2482.73,2049.66
VCC on Top Layer "Top Layer-VCC" (solid, pour order 66): 1585.91,788.98 1760,788.98 1835.91,779.06 1835.91,668.98 1586.7,568.2 1585.91,568.98
VCC on Top Layer "Top Layer-VCC 3" (solid, pour order 36): 698.82,68.9 708.66,78.74 708.66,285.43 846.46,423.23 1161.13,423.23 1650.59,443.9 1672.53,651.14 1377.95,651.14 1328.74,777.56 1312.3,773.94 1301.14,651.14 1100,500 765.75,500 511.81,246.06 511.81,88.58 531.5,68.9 541.34,68.9
no net on Top Layer "Top Layer-No Net 2" (solid, pour order 58): 1260,540
no net on Top Layer "Top Layer-No Net 1" (solid, pour order 50): 472.44,738.19
VCC on Top Layer "Top Layer-VCC 4" (solid, pour order 44): 3454.72,118.11
GND on Bottom Layer "Bottom Layer-No Net" (solid, remove dead copper, pour order 70): 98.42,2047.24 57.89,2006.71 57.89,55.2 81.15,31.94 2472.89,31.94 2482.73,41.78 2660.43,219.49 2660.43,1419.2 2522.1,1557.53 2522.1,2010.29 2482.73,2049.66
GND on Bottom Layer "Bottom Layer-GND 1" (solid, pour order 64): 825.37,1273.62 452.76,1273.62 338.58,1159.45 338.58,762.8 664.37,437.01 664.37,436.02 763.78,336.61 763.78,140.75 813.37,127.95 848.43,132.53 848.43,373.17 629.92,591.67 601.82,630.46 593.5,638.78 415.35,816.93 415.35,1068.9 496.06,1149.61 813.37,1149.61
GND on Bottom Layer "Bottom Layer-GND" (solid, pour order 68): 833.61,862.25 789.37,906.5 789.37,1244.09 825.37,1273.62 1182.09,1273.62 1287.4,1190.94 1287.4,954.3 1197.28,864.18

## Silkscreen, mask and mechanical layers (free items; w line width, h text height)
Top Overlay:
  lines w10: 255.91,521.65 295.28,521.65 ; 275.59,501.97 275.59,541.34
  text "TX" at 2381.89,1860.24 h31.5 r90
  text "RX" at 2480.32,1860.24 h31.5 r90
  text "SCK" at 1131.89,1830.71 h31.5 r90
  text "SDA" at 826.77,1820.87 h31.5 r90
  text "SCL" at 738.19,1811.02 h31.5 r90
  text "MOSI" at 1328.74,1811.02 h31.5 r90
  text "GND" at 1023.62,1801.18 h39.37 r90
  text "PULL A" at 1929.13,1791.34 h31.5
  text "FOC" at 187.01,1751.97 h137.8 r90
  text "MISO" at 1223.81,1703.23 h31.5 r90
  text "SCL / PULL" at 551.18,1692.91 h31.5
  text "A/U" at 2177.17,1663.39 h39.37
  text "project" at 295.28,1643.7 h137.8 r90
  text "PULL B" at 1919.29,1584.65 h31.5
  text "B/V" at 2179.13,1557.09 h39.37
  text "SDA / PULL" at 482.28,1545.28 h31.5
  text "I/W" at 2183.07,1460.63 h39.37
  text "Simple" at 187.01,1368.11 h137.8 r90
  text "GND" at 2175.2,1356.3 h39.37
  text "5V" at 2212.6,1255.91 h39.37
  text "Shield" at 2096.46,807.09 h137.8 r90
  text "FOC" at 2096.46,551.18 h137.8 r90
  text "V2.0.3" at 2203.74,210.63 h118.11 r90
  text "Arduino/STM32 / BLDC / Encoder/Hall / Current Sense" at 2491.14,210.63 h39.37 r90
  text "Simple" at 2096.46,196.85 h137.8 r90
  text "VIN" at 1723.43,172.24 h31.5
  text "5V" at 1430,170 h39.37
  text "GND" at 1560,170 h39.37
  text "Input / 12-24V" at 69.52,43.57 h47.24
  text "VCC" at 482.28,15.75 h59.06 r90
  text "GND" at 991.14,6.89 h59.06 r90
Bottom Overlay:
  text "docs.simplefoc.com / 02/2021" at 226.38,2007.87 h39.37 r90
  text "Solder to enable / encoder pullups" at 2086.61,1830.71 h39.37 r90
  text "8" at 1532.98,1793 h39.37
  text "6" at 1053.15,1791.34 h39.37
  text "10" at 1338.58,1791.34 h39.37
  text "5" at 1722.44,1791.34 h39.37
  text "Pull  / SCL" at 875.98,1781.5 h39.37
  text "enable" at 1505.91,1771.65 h39.37 r90
  text "pwm C" at 1043.31,1761.81 h39.37 r90
  text "pwm B" at 1328.74,1761.81 h39.37 r90
  text "pwm A" at 1712.6,1761.81 h39.37 r90
  text "13" at 1230.31,1722.44 h39.37
  text "Pull  / A" at 2470.47,1683.07 h39.37
  text "Pull  / SDA" at 875.98,1614.17 h39.37
  text "B" at 2431.1,1525.59 h39.37
  text "9" at 1397.64,1486.22 h39.37
  text "7" at 1663.39,1486.22 h39.37
  text "3" at 1850.39,1486.22 h39.37
  text "11" at 1043.31,1476.38 h39.37
  text "Solder to enable  / I2C pullups" at 875.98,1446.85 h39.37
  text "I" at 2598.43,1318.9 h39.37
  text "L6234 pinout config  / PWM & enable" at 1834.65,1199.8 h39.37
  text "13" at 2539.37,1131.89 h39.37
  text "4" at 2234.25,1122.05 h39.37
  text "Encoder/Hall  / pinout config" at 2120,1120 h39.37 r90
  text "C" at 314.96,1031.5 h39.37 r90
  text "I/W" at 2588.58,900 h39.37 r270
  text "11" at 2291.74,884.26 h39.37
  text "2" at 2533.46,862.2 h39.37
  text "B" at 314.96,836.61 h39.37 r90
  text "B/V" at 2588.58,755.51 h39.37 r270
  text "A4" at 2216.54,729.33 h39.37
  text "12" at 2559.06,688.98 h39.37
  text "Current sense / pinoout & ADC / config" at 1504.41,679.13 h39.37 r90
  text "A" at 314.96,645.67 h39.37 r90
  text "Enable 8V / regulator  / VIN" at 1118.11,554.13 h39.37 r90
  text "A1" at 1873.03,541.34 h39.37
  text "A3" at 2063.98,541.34 h39.37
  text "phase B" at 2182.09,541.34 h39.37 r90
  text "5V" at 1639.76,540.35 h39.37
  text "3" at 2283.46,531.5 h39.37
  text "range" at 1603.35,513.78 h39.37 r90
  text "phase A" at 1813.98,509.84 h39.37 r90
  text "A/U" at 2598.43,494.09 h39.37 r270
  text "A5" at 2559.06,374.02 h39.37
  text "A0" at 1960.63,204.72 h39.37
  text "A2" at 2183.07,199.8 h39.37
  text "3.3V" at 1724.41,191.93 h39.37
  text "GND" at 869.09,20.67 h39.37
  text "VCC" at 666.34,15.75 h39.37
Mechanical 1:
  lines w10: 34.45,44.29 78.74,0 ; 78.74,0 2519.68,0 2578.74,59.06 2578.74,78.74 2696.85,196.85 2696.85,1456.69 2578.74,1574.8 2578.74,2027.56 2519.68,2086.61 78.74,2086.61 27.56,2035.43 27.56,51.18 78.74,0

## Text inside footprints (layer, text, board x,y; h text height)
CAP1: Top Overlay "+" at 1690.31,657.01 h60 r270
CAP2: Top Overlay "+" at 1339.69,382.99 h60 r90